# Altium PCB ControllerPCB.PcbDoc
Units mm, origin at the board's own origin, x right, y up, seen from the top; angles counter-clockwise.
Board outline 113.03 x 63.5 mm, 2 copper layers (Top Layer, Bottom Layer); 24 components, 28 nets, 132 pads, 12 vias.
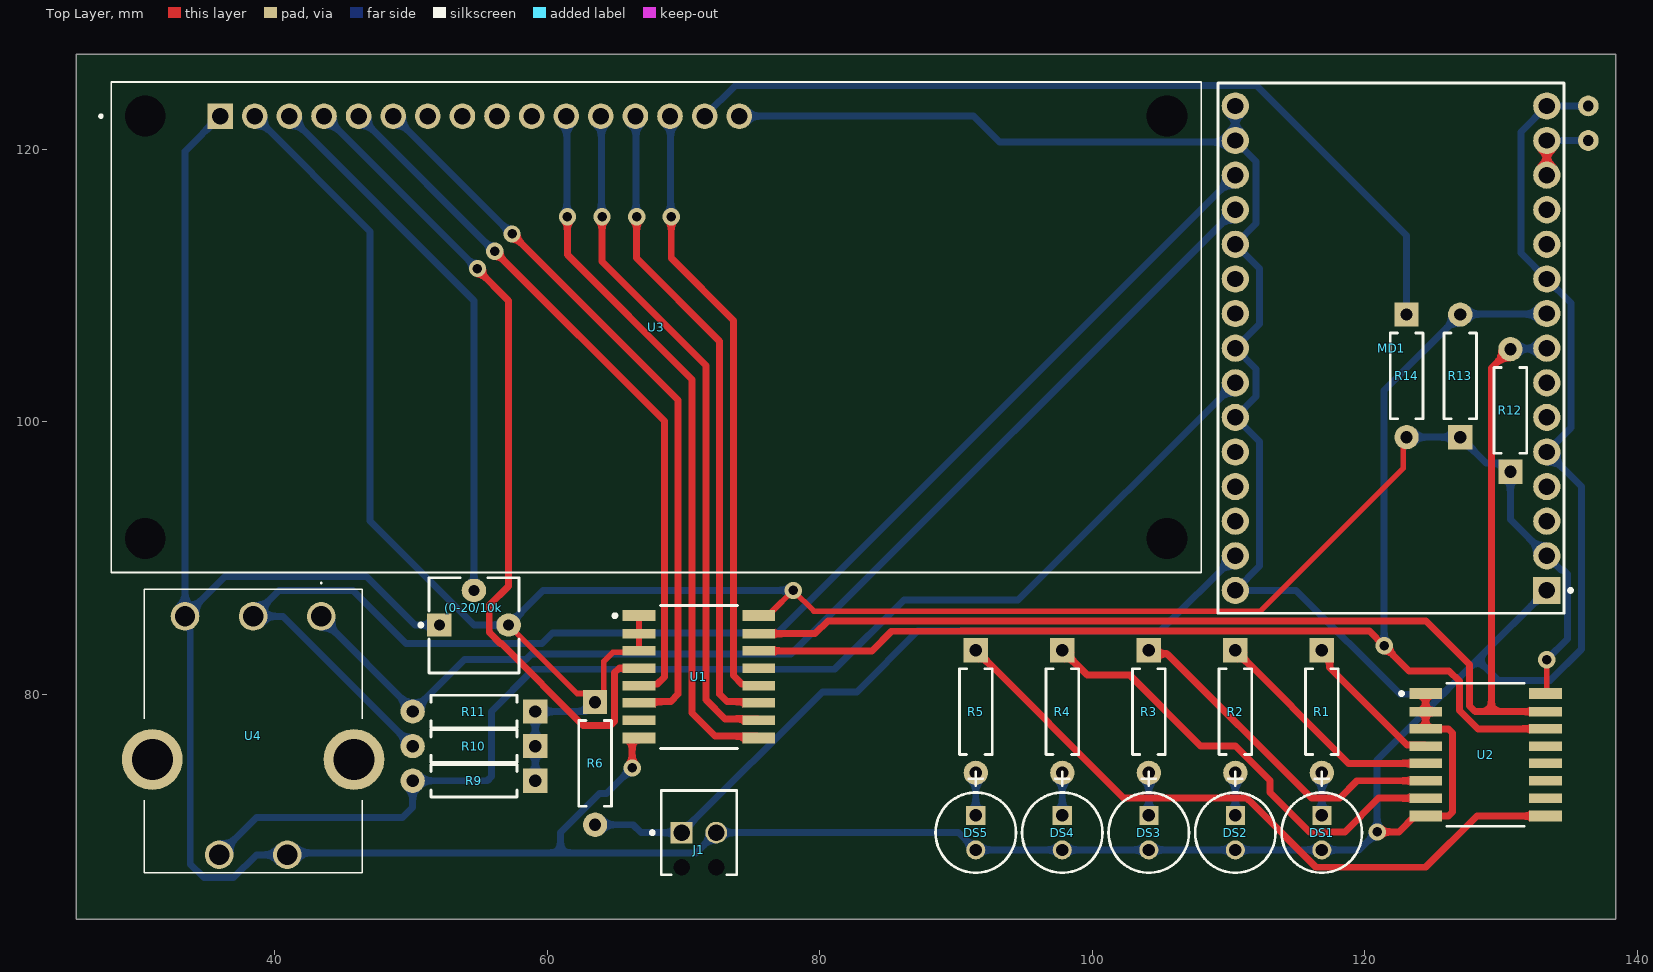
[diagram p0: Top Layer view]
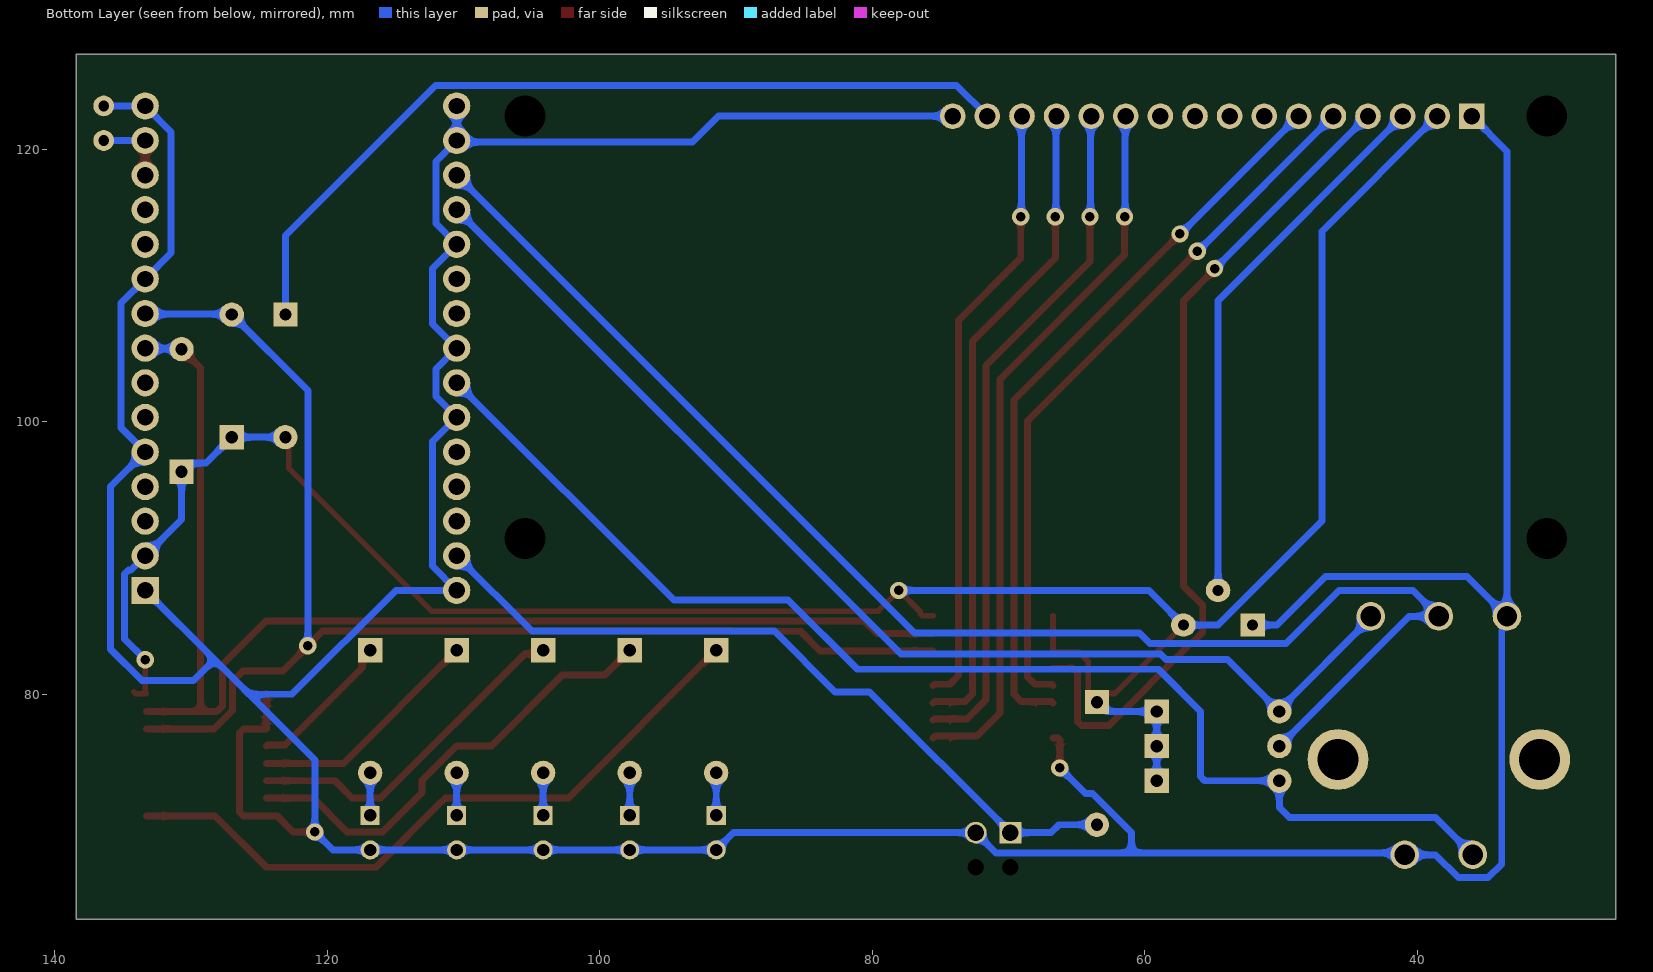
[diagram p1: Bottom Layer view, seen from below]

## Layer stack, top to bottom
Top Solder: solder mask 0.0102, Solder Resist, Dk 3.5
Top Layer: signal copper 0.0356
Dielectric 1: dielectric 0.32, FR-4, Dk 4.8
Bottom Layer: signal copper 0.0356
Bottom Solder: solder mask 0.0102, Solder Resist, Dk 3.5

## Board outline
25.4,127 25.4,63.5 138.43,63.5 138.43,127

## Design rules (kind name [scope] priority, off if disabled: settings)
Clearance [All] p1: gap=0.254 ignorepadtopadclearanceinfootprint=FALSE except(0: Arc-Hole Track-Hole SMDPad-Hole THPad-Hole Via-Hole Fill-Hole Poly-Hole Region-Hole Text-Hole)
ComponentClearance [All] p1 off: gap=0.254 collisioncheckmode=3 verticalgap=0.254 showdistances=FALSE
Height [All] p1 off: minheight=0 maxheight=25.4 prefheight=12.7
HoleSize [All] p1: absolutevalues=TRUE maxlimit=3 minlimit=0.7 maxpercent=80.000 minpercent=20.000
MinimumSolderMaskSliver [All] p1: minsoldermaskwidth=0.125
PlaneConnect [All] p1: planeconnectstyle=Relief reliefexpansion=0.508 reliefentries=4 reliefconductorwidth=0.305 reliefairgap=0.254
PolygonConnect [All] p1: connectstyle=Relief reliefconductorwidth=0.5 reliefentries=4 polygonreliefangle="90 Angle" airgapwidth=0.2
RoutingVias [All] p1: holewidth=0.7 width=1.7 viastyle="Through Hole" minholewidth=0.7 minwidth=1.7 maxholewidth=0.7 maxwidth=1.7
SilkToSilkClearance [All] p1: silktosilkclearance=0.12
SilkToSolderMaskClearance [IsPad] p1: minsilkscreentomaskgap=0.1 clearancetoexposedcopper=TRUE
SolderMaskExpansion [All] p1: expansion=0.102 istentingtop=FALSE
SupplyNets "Schematic Supply Nets_2" [InNet('GND')] p1: voltage=0.000
SupplyNets "Schematic Supply Nets_1" [InNet('+3V3')] p2: voltage=0.000
SupplyNets "Schematic Supply Nets" [InNet('+5')] p3: voltage=0.000
Width [All] p1: maxlimit=3.048 minlimit=0.305 preferedwidth=0.508
23 further rules are at their usual default settings.

## Components (designator, comment, footprint, x,y, rotation, side; value= is the part's Value field where it differs from the comment)
(0-20/10k "3362P-1-104LF" BOUR-3362P 54.61,85.055 r0 top
DS1 "RED" KING-WP7113SGD_V 116.84,69.85 r270 top
DS2 "RED" KING-WP7113SGD_V 110.49,69.85 r270 top
DS3 "RED" KING-WP7113SGD_V 104.14,69.85 r270 top
DS4 "RED" KING-WP7113SGD_V 97.79,69.85 r270 top
DS5 "RED" KING-WP7113SGD_V 91.44,69.85 r270 top
J1 "1725656" PHOE-1725656-2 71.12,69.85 r0 top
MD1 "ESP32-C3-DevKitC-02" FP-ESP32-C3-DevKitC-02-MFG 121.92,105.41 r180 top
R1 "Resistor 470r" RESA60-630X240 116.84,78.74 r270 top value=150r
R2 "Resistor 470r" RESA60-630X240 110.49,78.74 r270 top value=150r
R3 "Resistor 470r" RESA60-630X240 104.14,78.74 r270 top value=150r
R4 "Resistor 470r" RESA60-630X240 97.79,78.74 r270 top value=150r
R5 "Resistor 470r" RESA60-630X240 91.44,78.74 r270 top value=150r
R6 "4k7 resistor Axial" RESA60-630X240 63.5,74.93 r270 top value=10k
R9 "4k7 resistor Axial" RESA60-630X240 54.61,73.66 r180 top value=10k
R10 "4k7 resistor Axial" RESA60-630X240 54.61,76.2 r180 top value=10k
R11 "4k7 resistor Axial" RESA60-630X240 54.61,78.74 r180 top value=10k
R12 "4k7 resistor Axial" RESA60-630X240 130.683,100.838 r90 top value=4k7
R13 "4k7 resistor Axial" RESA60-630X240 127,103.378 r90 top value=4k7
R14 "4k7 resistor Axial" RESA60-630X240 123.063,103.378 r270 top value=220r
U1 "PCF8574T/3,518" FP-SOT162-1-MFG 71.12,81.28 r0 top
U2 "PCF8574T/3,518" FP-SOT162-1-MFG 128.86,75.565 r0 top
U3 "LCD-16X2" MODULE_LCD-16X2 67.98,106.94 r0 top
U4 "" PEC164120FS0012 43.401,85.725 r180 top

## Footprints (in the part's own frame and the unit in brackets; to place one, negate y for a bottom-side part, rotate by r counter-clockwise, add the part's x,y. Pads: shape width x height; smd on the part's side, far side on the other; paste and mask are expansions set on the pad)
BOUR-3362P [mm]
  rect 1.8x1.7 hole 0.8: 1(-2.54,0.035)
  oval 1.8x1.7 hole 0.8: 2(0,2.575) 3(2.54,0.035)
  silkscreen extent -4.02,-3.49 3.3,3.49, body extent -3.3,-3.49 3.3,3.5, height 4.5
FP-ESP32-C3-DevKitC-02-MFG [mm]
  rect 2x2 hole 1.2 paste-2539.97 mask+0: 1(-11.43,17.78)
  round 2 hole 1.2 paste-2539.97 mask+0: 2(-11.43,15.24) 3(-11.43,12.7) 4(-11.43,10.16) 5(-11.43,7.62) 6(-11.43,5.08) 7(-11.43,2.54) 8(-11.43,0) 9(-11.43,-2.54) 10(-11.43,-5.08) 11(-11.43,-7.62) 12(-11.43,-10.16) 13(-11.43,-12.7) 14(-11.43,-15.24) 15(-11.43,-17.78) 16(11.43,-17.78) 17(11.43,-15.24) 18(11.43,-12.7) 19(11.43,-10.16) 20(11.43,-7.62) 21(11.43,-5.08) 22(11.43,-2.54) 23(11.43,0) 24(11.43,2.54) 25(11.43,5.08) 26(11.43,7.62) 27(11.43,10.16) 28(11.43,12.7) 29(11.43,15.24) 30(11.43,17.78)
  silkscreen extent -13.3,-19.45 12.7,19.45, body extent -12.8,-19.56 12.8,19.56, height 0.25
FP-SOT162-1-MFG [mm]
  rect 2.4x0.8 smd paste+0 mask+0: 1(-4.4,4.495) 8(-4.4,-4.495) 9(4.4,-4.495) 16(4.4,4.495)
  rect 2.4x0.7 smd paste+0 mask+0: 2(-4.4,3.175) 3(-4.4,1.905) 4(-4.4,0.635) 5(-4.4,-0.635) 6(-4.4,-1.905) 7(-4.4,-3.175) 10(4.4,-3.175) 11(4.4,-1.905) 12(4.4,-0.635) 13(4.4,0.635) 14(4.4,1.905) 15(4.4,3.175)
  silkscreen extent -6.29,-5.25 2.82,5.25, body extent -5.72,-5.95 5.72,5.95, height 0.25
KING-WP7113SGD_V [mm]
  rect 1.4x1.4 hole 0.9: 1(-1.27,0)
  round 1.4 hole 0.9: 2(1.27,0)
  silkscreen extent -4.47,-2.95 2.95,2.95, body extent -2.95,-2.95 2.5,2.95, height 15.5
MODULE_LCD-16X2 [mm]
  rect 1.88x1.88 / inner round 1.88 / far side rect 1.88x1.88 hole 1.2: 1(-32,15.5)
  round 1.88 hole 1.2: 2(-29.46,15.5) 3(-26.92,15.5) 4(-24.38,15.5) 5(-21.84,15.5) 6(-19.3,15.5) 7(-16.76,15.5) 8(-14.22,15.5) 9(-11.68,15.5) 10(-9.14,15.5) 11(-6.6,15.5) 12(-4.06,15.5) 13(-1.52,15.5) 14(1.02,15.5) 15(3.56,15.5) 16(6.1,15.5)
  round 2.8 hole 3 unplated: ""(-37.5,-15.5) ""(-37.5,15.5) ""(37.5,-15.5) ""(37.5,15.5)
  silkscreen extent -40.85,-18 40,18
PEC164120FS0012 [mm]
  round 2.1 hole 1.5: A1(0,0) B1(5,0) C1(10,0) D1(2.5,17.5) E1(7.5,17.5)
  round 4.46 hole 3: MH1(-2.4,10.5) MH2(12.4,10.5)
  silkscreen extent -3,-2.5 13,18.8, body extent -3.85,-1.95 13.85,18.75, height 30.47
PHOE-1725656-2 [mm] "Connector, 2-Leads, Body 6.2x5.4mm, Pitch 2.54mm"
  rect 1.6x1.6 hole 1.2: 1(-1.27,0)
  round 1.6 hole 1.2: 2(1.27,0)
  round 0 hole 1.2 unplated: MH1(-1.27,-2.54) MH2(1.27,-2.54)
  silkscreen extent -3.54,-3.1 2.77,3.1, body extent -2.77,-3.1 2.77,3.1, height 9
RESA60-630X240 [mm]
  rect 1.778x1.778 hole 0.9: 1(-4.5,0)
  round 1.778 hole 0.9: 2(4.5,0)
  silkscreen extent -3.15,-1.2 3.15,1.2, body extent -4.77,-1.19 4.77,1.2, height 2.4

## Part data
(0-20/10k: library part CMP-009-00040-2, "Square Trimpot(R) Trimming Potentiometer, 100 KOhm, 300 V, -55 to 125 degC, 3-Pin THD, RoHS, Tube", Case/Package=3326P, Manufacturer=Bourns, Max Operating Temperature=125°C, Min Operating Temperature=-55°C, Package Description="3-Pin Through Hole Device, Body 6.6 x 6.99 mm, Pitch 2.54 mm", Package Quantity=250, Power=500mW, Resistance=100k, Tolerance=10%, Voltage Rating=300V, Component Type=Resistors, Composition=Potentiometer, Datasheet URL=http://www.bourns.com/docs/Product-Datasheets/3362.pdf, Datasheet Version=May-16, Lead Pitch=2.54mm, Manufacturer Part Number=3362P-1-104LF, Manufacturer URL=http://www.bourns.com/, Mounting Technology=TH, Package Reference=3326P, Packaging=Rail/Tube, RoHS Compliant=True
DS1 DS2 DS3 DS4 DS5: library part CMP-007-00010-1, "LED Green, 62.5 mW, 25 mA, -40 to 85 degC, 2-Pin THD, RoHS, Bulk", Case/Package=Radial, Colour=Green, Forward Voltage=2.2V, Manufacturer=Kingbright, Manufacturer Part Number=WP7113SGD, Package Description="2-Pin Through Hole Device, Dia 5.9 mm, Body Length 8.6 mm", Package Quantity=1000, Power=62.5mW, Component Type=LED, Datasheet URL=http://www.kingbrightusa.com/images/catalog/SPEC/WP7113SGD.pdf, Datasheet Version="Rev. 6B, 01/2015", Illumination Colour=Green, Lens Style=Dome, Luminous Intensity=40mcd, Mounting Technology=TH, Nominal Vf=2.2V, Package Reference=WP7113SGD, Packaging=Bulk, RoHS Compliant=True, Viewing Angle=30degrees
J1: library part CMP-2000-05299-1, "Male Header, Pitch 2.54 mm, 1 x 2 Position, Height 9 mm, Tail Length 3.5 mm", Colour=Green, Manufacturer="Phoenix Contact", Content=250pc(s), Datasheet URL=http://datasheet.octopart.com/1725656-Phoenix-Contact-datasheet-5302866.pdf, Datasheet Version=Apr-08, Industrial packaging=Yes, Manufacturer part No.=1725656, Manufacturer URL=http://www.phoenixcontact.com/, Number of contacts=2, Pitch=2.54mm, Type=MPT0,5/2-2,54
MD1: library part CMP-194061-000001-1, "ESP32-C3-WROOM-02 DEV BRD"
R1 R2 R3 R4 R5: library part CMP-009-00177-3, "Axial Resistor, 470 Ohm", Case/Package=Axial, Package Description="2-Pin Axial Lead, Dia 2.4 mm, Body Length 6.3 mm", Component Type=Resistors, Mounting Technology=TH
R6 R9 R10 R11 R12 R13 R14: library part CMP-009-00178-1, "Axial Resistor, 4.7 KOhm", Case/Package=Axial, Package Description="2-Pin Axial Lead, Dia 2.4 mm, Body Length 6.3 mm", Tolerance=1%, Component Type=Resistors
U1 U2: library part CMP-10112-000010-1, "IC I/O EXPANDER I2C 8B 16SOIC", Ambient Temperature Range High=+85°C, Ambient Temperature Range Low=-40°C, Frequency=100kHz, Manufacturer="NXP Semiconductors", Max Junction Temp=+125°C, Max Supply Voltage=6V, Min Supply Voltage=2.5V, Nominal Supply Current=40uA, Package=SOT162-1, Temperature="-40°C to +85°C", Automotive=No, Category=IC, ComponentLink2Description=Datasheet, ComponentLink2URL=https://www.nxp.com/docs/en/data-sheet/PCF8574_PCF8574A.pdf, Device Class L1="Integrated Circuits (ICs)", Device Class L2="Interface ICs", Device Class L3="I/O Expanders", Digikey Description="IC I/O EXPANDER I2C 8B 16SOIC", Footprint Url=https://www.nxp.com/docs/en/package-information/SOT162-1.pdf, Height=2.65mm, Interface=I2C, Ipc Land Pattern Name=SOIC127P1032X265-16, Lead Free=Yes, Manufacturer Part Number=PCF8574T/3,518, Mouser Description="PCF8574 Series 2.5 - 6V Remote 8-bit I/O Expander for I2C-bus - SOIC-16", Number Of I/Os=8, Octopart=https://octopart.com/pcf8574t%2F3%2C518-nxp+semiconductors-10470852, RoHS=TRUE, Standoff Height=0.1mm, Temperature Range High=+85°C, Temperature Range Low=-40°C
U3: "Display Development Tools 16x2 Black on Green Char LCD w Backlight", Package=None, Availability="Not in stock", Check_prices=https://www.snapeda.com/parts/LCD-16X2/Gravitech/view-part/?ref=eda, MF=Gravitech, MP=LCD-16X2, Price=None, SnapEDA_Link=https://www.snapeda.com/parts/LCD-16X2/Gravitech/view-part/?ref=snap
U4: library part PEC16-4220F-S0024, "Undefined or Miscellaneous", Manufacturer_Name=Bourns, Arrow Part Number=PEC16-4220F-S0024, Arrow Price/Stock=null?utm_currency=USD&region=nac, Datasheet Link=https://www.bourns.com/pdfs/PEC16.pdf, Height=28mm, Manufacturer_Part_Number=PEC16-4220F-S0024

## Free pads (board coordinates)
  round 1.524 hole 0.8: 3(136.398,123.19) 4(136.398,120.65)

## Via types
v1: diameter 1.27, hole 0.7, Top Layer to Bottom Layer, 12 vias

## Nets (pads, with @x,y where several pads share a name; then routed paths per layer and width w, separated by ;. In a path a pad name is that pad's centre, name@x,y a point inside that pad or via, vN(x,y) a via of type N, cw(c..) or ccw(c..) an arc to the next point about the centre after c; other vN are vias at no path point)
+3.3: (0-20/10k.3 MD1.2 R6.1 R9.1 R10.1 R11.1 R12.1 R13.1 R14.2 U1.1 U1.2 U1.3 U1.16 U2.16 U3.2 | length 180.8
  Top Layer w0.408: 57.15,85.09 62.175,80.065 62.865,80.065 R6.1 64.135,80.065 64.135,82.423 64.801,83.089 66.624,83.089 U1.3 U1.2 U1.1 ; U1.16 76.32,85.775 76.466,85.921 76.466,86.062 v1(78.034,87.63) 79.558,86.106 89.725,86.106 89.73,86.111 112.324,86.111 122.82,96.607 122.82,98.635 R14.2 ; R13.1 R13.1@127.635,98.243 ; v1(133.35,82.55) 133.35,80.15 U2.16 134.06,80.06 U2.16@134.206,80.206 ; MD1.2@133.35,89.918 MD1.2
  Bottom Layer w0.508: U3.2 46.981,113.979 46.981,92.719 54.61,85.09 57.15,85.09 59.69,87.63 v1(78.034,87.63) ; R9.1 R10.1 R11.1 62.81,78.74 R6.1 ; R14.2 R13.1 128.905,96.973 130.048,96.973 R12.1 130.683,92.837 MD1.2 133.357,90.17 134.389,89.138 134.56,89.138 134.874,88.824 134.874,84.074 v1(133.35,82.55)
+5: MD1.13 MD1.14 pad.4 | length 5.6
  Top Layer w0.508: MD1.13 MD1.14
  Bottom Layer w0.508: MD1.14 pad.4
GND: (0-20/10k.1 DS1.2 DS2.2 DS3.2 DS4.2 DS5.2 J1.2 MD1.1 MD1.5 MD1.10 MD1.15 MD1.16 MD1.17 MD1.20 MD1.23 MD1.25 MD1.30 pad.3 U1.8 U2.1 U2.2 U2.3 U2.8 U3.1 U3.16 U4.C1 U4.D1 | length 371.2
  Top Layer w0.508: v1(66.218,74.6) 66.218,76.639 66.364,76.785 U1.8 ; v1(120.904,69.901) 122.491,69.901 123.66,71.07 126.144,71.07 126.442,71.368 126.442,77.172 126.144,77.47 U2.3 U2.2 U2.1
  Bottom Layer w0.508: U3.1 33.401,119.861 U4.C1 ; 52.07,85.09 50.292,85.09 46.736,88.646 36.322,88.646 U4.C1 ; v1(66.218,74.6) 64.349,72.731 63.826,72.731 60.96,69.866 60.96,68.368 ; U3.16 91.271,122.44 93.179,120.532 110.372,120.532 MD1.17 ; MD1.16 MD1.17 ; MD1.1 128.27,82.55 ; pad.3 MD1.15 131.445,121.285 131.445,112.395 MD1.10 135.128,108.712 135.128,99.568 MD1.5 135.89,95.25 135.89,83.312 133.604,81.026 129.794,81.026 128.27,82.55 ; U4.C1 33.677,85.449 33.677,84.812 33.782,84.706 33.782,67.564 34.798,66.548 36.963,66.548 38.64,68.225 U4.D1 41.044,68.368 60.96,68.368 ; 60.96,68.368 70.908,68.368 J1.2 90.17,69.85 DS5.2 DS4.2 DS3.2 DS2.2 DS1.2 119.583,68.58 v1(120.904,69.901) 120.904,75.184 125.73,80.01 ; MD1.17 112.014,119.126 112.014,114.554 MD1.20 112.268,111.252 112.268,107.188 MD1.23 112.014,103.886 112.014,101.854 MD1.25 112.268,98.552 112.268,89.408 MD1.30 114.946,87.63 122.566,80.01 125.73,80.01 ; 125.73,80.01 128.27,82.55
GPIO0: J1.1 MD1.29 R6.2 | length 55.6
  Bottom Layer w0.508: R6.2 66.284,70.43 66.864,69.85 J1.1 80.181,80.181 82.721,80.181 87.177,84.637 104.957,84.637 MD1.29
GPIO10: MD1.24 R9.2 U4.E1 | length 92.9
  Bottom Layer w0.508: U4.E1 38.635,70.959 49.369,70.959 50.11,71.7 R9.2 55.582,73.66 55.88,73.958 55.88,78.74 58.983,81.843 81.081,81.843 86.157,86.919 94.539,86.919 MD1.24
GPIO18: MD1.19 R11.2 U4.A1 | length 85.4
  Bottom Layer w0.508: U4.A1 43.401,85.587 50.11,78.878 R11.2 53.92,82.55 58.42,82.55 58.84,82.97 77.89,82.97 MD1.19
GPIO19: MD1.18 R10.2 U4.B1 | length 104.4
  Bottom Layer w0.508: R10.2 40.585,85.725 U4.B1 40.306,87.63 45.72,87.63 49.618,83.732 59.602,83.732 60.364,84.494 76.874,84.494 MD1.18
Net(0-20/10k_2: (0-20/10k.2 U3.3 | length 40.4
  Bottom Layer w0.508: U3.3 54.61,108.89 54.61,87.63
NetDS1_1: DS1.1 R1.2 | length 3.1
  Bottom Layer w0.508: DS1.1 R1.2
NetDS2_1: DS2.1 R2.2 | length 3.1
  Bottom Layer w0.508: DS2.1 R2.2
NetDS3_1: DS3.1 R3.2 | length 3.1
  Bottom Layer w0.508: DS3.1 R3.2
NetDS4_1: DS4.1 R4.2 | length 3.1
  Bottom Layer w0.508: DS4.1 R4.2
NetDS5_1: DS5.1 R5.2 | length 3.1
  Bottom Layer w0.508: DS5.1 R5.2
NetR1_1: R1.1 U2.4 | length 10.9
  Top Layer w0.508: R1.1 117.415,82.665 117.415,81.975 123.094,76.296 124.364,76.296 U2.4
NetR2_1: R2.1 U2.5 | length 17.4
  Top Layer w0.508: R2.1 118.8,74.93 U2.5
NetR3_1: R3.1 U2.6 | length 25.3
  Top Layer w0.508: R3.1 104.405,82.975 105.493,82.975 116.078,72.39 118.164,72.39 119.434,73.66 U2.6
NetR4_1: R4.1 U2.7 | length 33.7
  Top Layer w0.508: R4.1 99.623,81.407 102.743,81.407 107.95,76.2 110.506,76.2 113.03,73.676 113.03,72.812 115.93,69.912 118.531,69.912 121.009,72.39 U2.7
NetR5_1: R5.1 U2.9 | length 50
  Top Layer w0.508: R5.1 102.29,72.39 111.322,72.39 111.384,72.328 111.4,72.328 111.698,72.03 111.698,72.014 116.402,67.31 124.46,67.31 128.22,71.07 U2.9
NetR14_1: R14.1 U3.15 | length 62.8
  Bottom Layer w0.508: U3.15 73.798,124.698 112.037,124.698 123.063,113.672 R14.1
P0_RS: U1.4 U3.4 | length 61.8
  Top Layer w0.508: v1(54.864,111.252) 54.864,111.176 57.15,108.89 57.15,87.935 55.728,86.512 55.728,84.619 55.742,84.604 55.742,84.527 56.537,83.732 56.614,83.732 62.622,77.724 64.625,77.724 64.922,78.022 64.922,81.597 65.24,81.915 U1.4
  Bottom Layer w0.508: U3.4 43.638,122.44 54.826,111.252 v1(54.864,111.252)
P1_RW: U1.5 U3.5 | length 52.7
  Top Layer w0.508: U3.5 U3.5@46.178,122.44 ; v1@56.096,112.522 56.096,112.484 56.172,112.484 68.58,100.076 68.58,81.28 68.041,80.741 66.816,80.741 U1.5
  Bottom Layer w0.508: U3.5 46.178,122.44 56.096,112.522 v1(56.134,112.522)
P2_E: U1.6 U3.6 | length 54.4
  Top Layer w0.508: U3.6 U3.6@48.718,122.44 ; v1@57.366,113.792 57.366,113.754 57.442,113.754 69.596,101.6 69.596,80.01 69.057,79.471 66.816,79.471 U1.6
  Bottom Layer w0.508: U3.6 48.718,122.44 57.366,113.792 v1(57.404,113.792)
P4_DB4: U1.9 U3.11 | length 53.3
  Top Layer w0.508: v1(61.468,115.062) 61.468,112.268 70.612,103.124 70.612,78.632 72.313,76.931 75.374,76.931 U1.9
  Bottom Layer w0.508: U3.11 61.424,122.396 61.424,115.106 v1(61.468,115.062)
P5_DB5: U1.10 U3.12 | length 50.5
  Top Layer w0.508: v1(64.008,115.062) 64.008,111.76 71.628,104.14 71.628,79.604 73.031,78.201 75.424,78.201 U1.10
  Bottom Layer w0.508: U3.12 63.964,122.396 63.964,115.106 v1(64.008,115.062)
P6_DB6: U1.11 U3.13 | length 48.1
  Top Layer w0.508: v1(66.548,115.062) 66.548,112.014 72.644,105.918 72.644,80.01 73.183,79.471 75.424,79.471 U1.11
  Bottom Layer w0.508: U3.13 66.504,122.396 66.504,115.106 v1(66.548,115.062)
P7_DB7: U1.12 U3.14 | length 45.2
  Top Layer w0.508: v1(69.088,115.062) 69.088,112.014 73.66,107.442 73.66,81.376 74.295,80.741 75.424,80.741 U1.12
  Bottom Layer w0.508: U3.14 69.044,122.396 69.044,115.106 v1(69.088,115.062)
SCL: MD1.9 R13.2 U1.14 U2.14 | length 95.6
  Top Layer w0.508: U1.14 83.809,83.185 85.256,84.632 90.336,84.632 90.341,84.637 120.341,84.637 v1(121.412,83.566) 123.248,81.73 126.186,81.73 126.93,80.986 126.93,78.831 128.291,77.47 U2.14
  Bottom Layer w0.508: v1(121.412,83.566) 121.412,102.29 R13.2 127.036,107.914 133.314,107.914 MD1.9
SDA: MD1.8 R12.2 U1.15 U2.15 | length 92.5
  Top Layer w0.508: U1.15 79.654,84.455 80.593,85.394 90.02,85.394 90.025,85.399 124.487,85.399 125.749,84.137 127.692,82.194 127.692,79.146 128.098,78.74 129.286,78.74 ; R12.2 129.286,103.941 129.286,78.74 ; U2.15 129.286,78.74
  Bottom Layer w0.508: R12.2 130.719,105.374 133.314,105.374 MD1.8
pads on no net: J1.MH1 J1.MH2 MD1.3 MD1.4 MD1.6 MD1.7 MD1.11 MD1.12 MD1.21 MD1.22 MD1.26 MD1.27 MD1.28 U1.7 U1.13 U2.10 U2.11 U2.12 U2.13 U3. U3.7 U3.8 U3.9 U3.10 U4.MH1 U4.MH2